# EAGLE board A1-Ricky A-Updated Board (EAGLE 7.0.0)
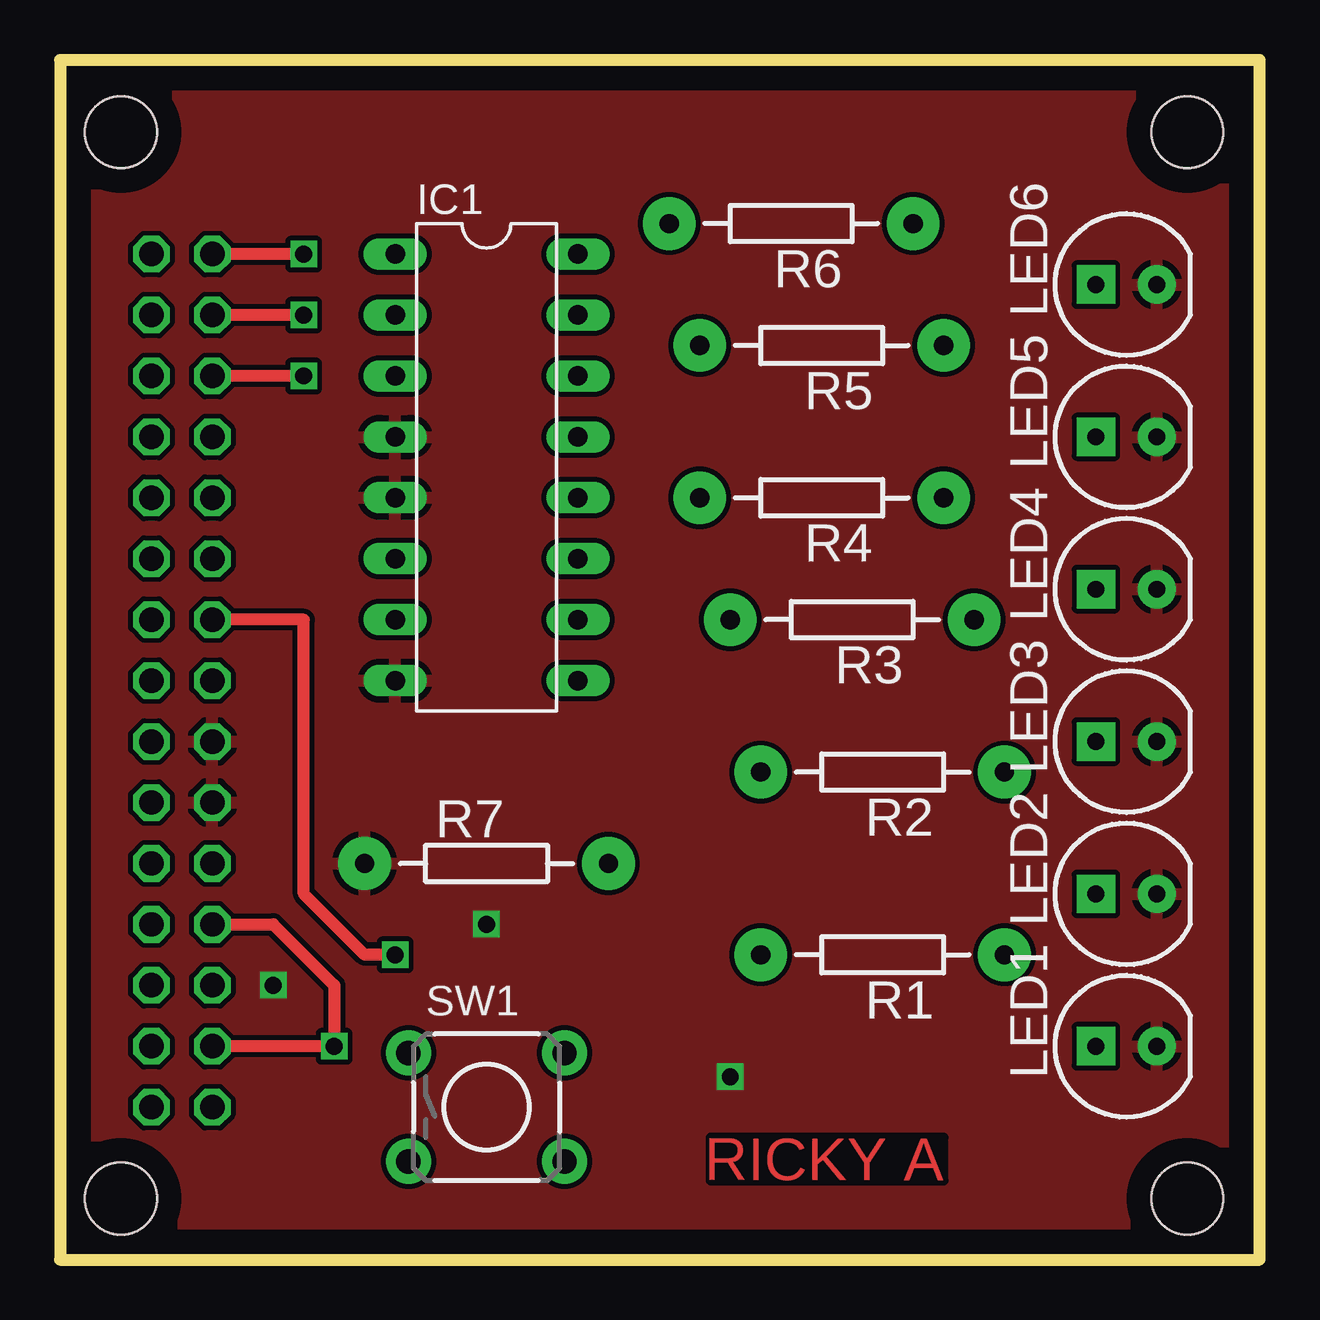
[diagram p0: board, top side]
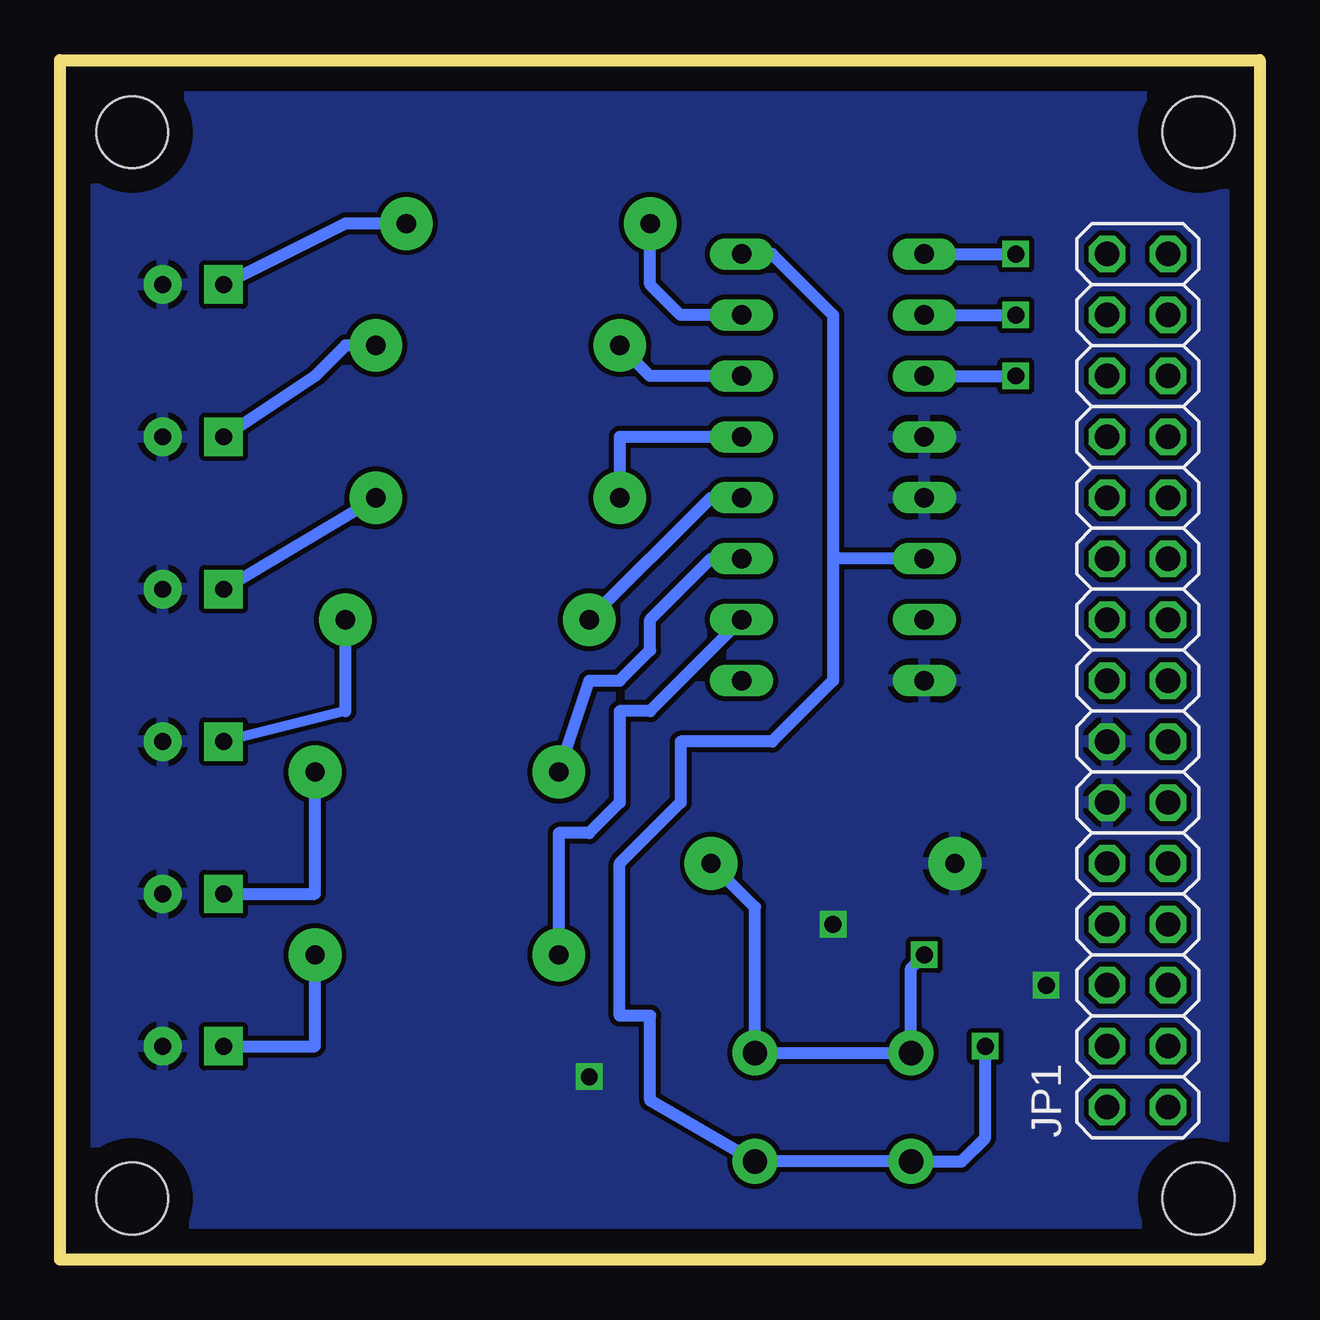
[diagram p1: board, bottom side, seen from below]

Size 50 x 50 mm. Coordinates in mm from the lower left corner, seen from the top.
Outline: 0,0 50,0 50,50 0,50 0,0
Copper layers (1*16): Top 0.035mm / dielectric 1.5mm / Bottom 0.035mm
Design rules "default": minimum track width 10mil, minimum drill 24mil, track to track 8mil, track to pad 8mil, pad to pad 8mil, via to via 8mil, smd to smd 8mil, copper to edge 40mil, drill to drill 8mil, minimum pad ring 10mil, minimum via ring 8mil, stop-mask expansion 4mil, vias tented up to drill 0mil, thermal gap 10mil
Holes 3 mm at 2.54,46.99 46.99,46.99 2.54,2.54 46.99,2.54

## Footprints (pad centres in the part's own frame; a part is rotated, then mirrored left to right if it is on the bottom)
DIL16 = drill 0.813 long: 1 -8.89,-3.81; 2 -6.35,-3.81; 3 -3.81,-3.81; 4 -1.27,-3.81; 5 1.27,-3.81; 6 3.81,-3.81; 7 6.35,-3.81; 8 8.89,-3.81; 9 8.89,3.81; 10 6.35,3.81; 11 3.81,3.81; 12 1.27,3.81; 13 -1.27,3.81; 14 -3.81,3.81; 15 -6.35,3.81; 16 -8.89,3.81
2X15 = drill 1.016 octagon: 1 -17.78,-1.27; 2 -17.78,1.27; 3 -15.24,-1.27; 4 -15.24,1.27; 5 -12.7,-1.27; 6 -12.7,1.27; 7 -10.16,-1.27; 8 -10.16,1.27; 9 -7.62,-1.27; 10 -7.62,1.27; 11 -5.08,-1.27; 12 -5.08,1.27; 13 -2.54,-1.27; 14 -2.54,1.27; 15 0,-1.27; 16 0,1.27; 17 2.54,-1.27; 18 2.54,1.27; 19 5.08,-1.27; 20 5.08,1.27; 21 7.62,-1.27; 22 7.62,1.27; 23 10.16,-1.27; 24 10.16,1.27; 25 12.7,-1.27; 26 12.7,1.27; 27 15.24,-1.27; 28 15.24,1.27; 29 17.78,-1.27; 30 17.78,1.27
LED-5MM = drill 0.7 pad 1.6 square: A 0,1.27 | drill 0.7 pad 1.6: C 0,-1.27
AXIAL-0.4 = drill 0.8 pad 2.2: P$1 -5.08,0; P$2 5.08,0
TACTILE-PTH = drill 1.016 pad 1.88: 1 -3.251,2.261; 2 3.251,2.261; 3 -3.251,-2.261; 4 3.251,-2.261

## Placement (x,y rotation side)
IC1  74HC238  [DIL16]  17.78,33.02 270 top
JP1  [2X15]  5.08,24.13 90 bottom
LED1  LED-5MM  [LED-5MM]  44.45,8.89 90 top
LED2  LED-5MM  [LED-5MM]  44.45,15.24 90 top
LED3  LED-5MM  [LED-5MM]  44.45,21.59 90 top
LED4  LED-5MM  [LED-5MM]  44.45,27.94 90 top
LED5  LED-5MM  [LED-5MM]  44.45,34.29 90 top
LED6  LED-5MM  [LED-5MM]  44.45,40.64 90 top
R1  330  [AXIAL-0.4]  34.29,12.7 180 top
R2  330  [AXIAL-0.4]  34.29,20.32 180 top
R3  330  [AXIAL-0.4]  33.02,26.67 180 top
R4  330  [AXIAL-0.4]  31.75,31.75 180 top
R5  330  [AXIAL-0.4]  31.75,38.1 180 top
R6  330  [AXIAL-0.4]  30.48,43.18 180 top
R7  [AXIAL-0.4]  17.78,16.51 0 top
SW1  [TACTILE-PTH]  17.78,6.35 0 top

## Library data of the parts
IC1 = 74xx-eu
JP1 = pinhead
LED1-LED6 R1-R7 = JCU
SW1 = SparkFun-Electromechanical

## Nets
GND: IC1.4 IC1.5 IC1.8 JP1.12 JP1.14 LED1.C LED2.C LED3.C LED4.C LED5.C LED6.C R7.P$1
LED1: IC1.1 JP1.30
LED2: IC1.2 JP1.28
LED3: IC1.3 JP1.26
N$1: IC1.10 R1.P$2
N$2: IC1.11 R2.P$2
N$3: IC1.12 R3.P$2
N$4: IC1.13 R4.P$2
N$5: IC1.14 R5.P$2
N$6: IC1.15 R6.P$2
N$7: LED1.A R1.P$1
N$8: LED2.A R2.P$1
N$9: LED3.A R3.P$1
N$10: LED4.A R4.P$1
N$11: LED5.A R5.P$1
N$12: LED6.A R6.P$1
SW1: JP1.18 R7.P$2 SW1.1 SW1.2
VCC: IC1.6 IC1.16 JP1.4 JP1.8 SW1.3 SW1.4

## Tracks (layer width: path | path; a pad name or v marks a point on that pad's centre or on a via)
GND  (via drill 0.7)
  other vias: 8.89,11.43 27.94,7.62 17.78,13.97
  pour Bottom: -1.27,52.07 52.07,52.07 52.07,-1.27 -1.27,-1.27
  pour Top: -1.27,52.07 52.07,52.07 52.07,-1.27 -1.27,-1.27
LED1  (via drill 0.7)
  Top 0.5: v10.16,41.91 JP1.30
  Bottom 0.5: IC1.1 v10.16,41.91
LED2  (via drill 0.7)
  Top 0.5: v10.16,39.37 JP1.28
  Bottom 0.5: IC1.2 v10.16,39.37
LED3  (via drill 0.7)
  Top 0.5: v10.16,36.83 JP1.26
  Bottom 0.5: IC1.3 v10.16,36.83
N$1
  Bottom 0.5: IC1.10 25.4,22.86 26.67,22.86 26.67,19.05 27.94,17.78 29.21,17.78 R1.P$2
N$2
  Bottom 0.5: IC1.11 22.86,29.21 25.4,26.67 25.4,25.4 26.67,24.13 27.94,24.13 R2.P$2
N$3
  Bottom 0.5: IC1.12 22.86,31.75 R3.P$2
N$4
  Bottom 0.5: IC1.13 26.67,34.29 R4.P$2
N$5
  Bottom 0.5: IC1.14 25.4,36.83 R5.P$2
N$6
  Bottom 0.5: IC1.15 24.13,39.37 25.4,40.64 R6.P$2
N$7
  Bottom 0.5: LED1.A 39.37,8.89 R1.P$1
N$8
  Bottom 0.5: LED2.A 39.37,15.24 R2.P$1
N$9
  Bottom 0.406: 38.1,22.86 LED3.A
  Bottom 0.5: 38.1,22.86 R3.P$1
N$10
  Bottom 0.5: LED4.A R4.P$1
N$11
  Bottom 0.5: R5.P$1 38.1,38.1 39.37,36.83 LED5.A
N$12
  Bottom 0.5: R6.P$1 38.1,43.18 LED6.A
SW1  (via drill 0.7)
  Top 0.5: v13.97,12.7 12.7,12.7 10.16,15.24 10.16,26.67 JP1.18
  Bottom 0.5: v13.97,12.7 14.53,12.14 SW1.1 SW1.2 21.03,14.68 R7.P$2
VCC  (via drill 0.7)
  Top 0.5: JP1.4 v11.43,8.89 11.43,11.43 8.89,13.97 JP1.8
  Bottom 0.5: IC1.16 20.32,41.91 17.78,39.37 17.78,29.21 | 17.78,29.21 17.78,24.13 20.32,21.59 24.13,21.59 24.13,19.05 26.67,16.51 26.67,10.16 25.4,10.16 25.4,6.63 SW1.4 SW1.3 12.42,4.09 11.43,5.08 v11.43,8.89 | IC1.6 17.78,29.21

## Text on the board
Top: RICKY A